# EAGLE board D43324 (EAGLE 6.1)
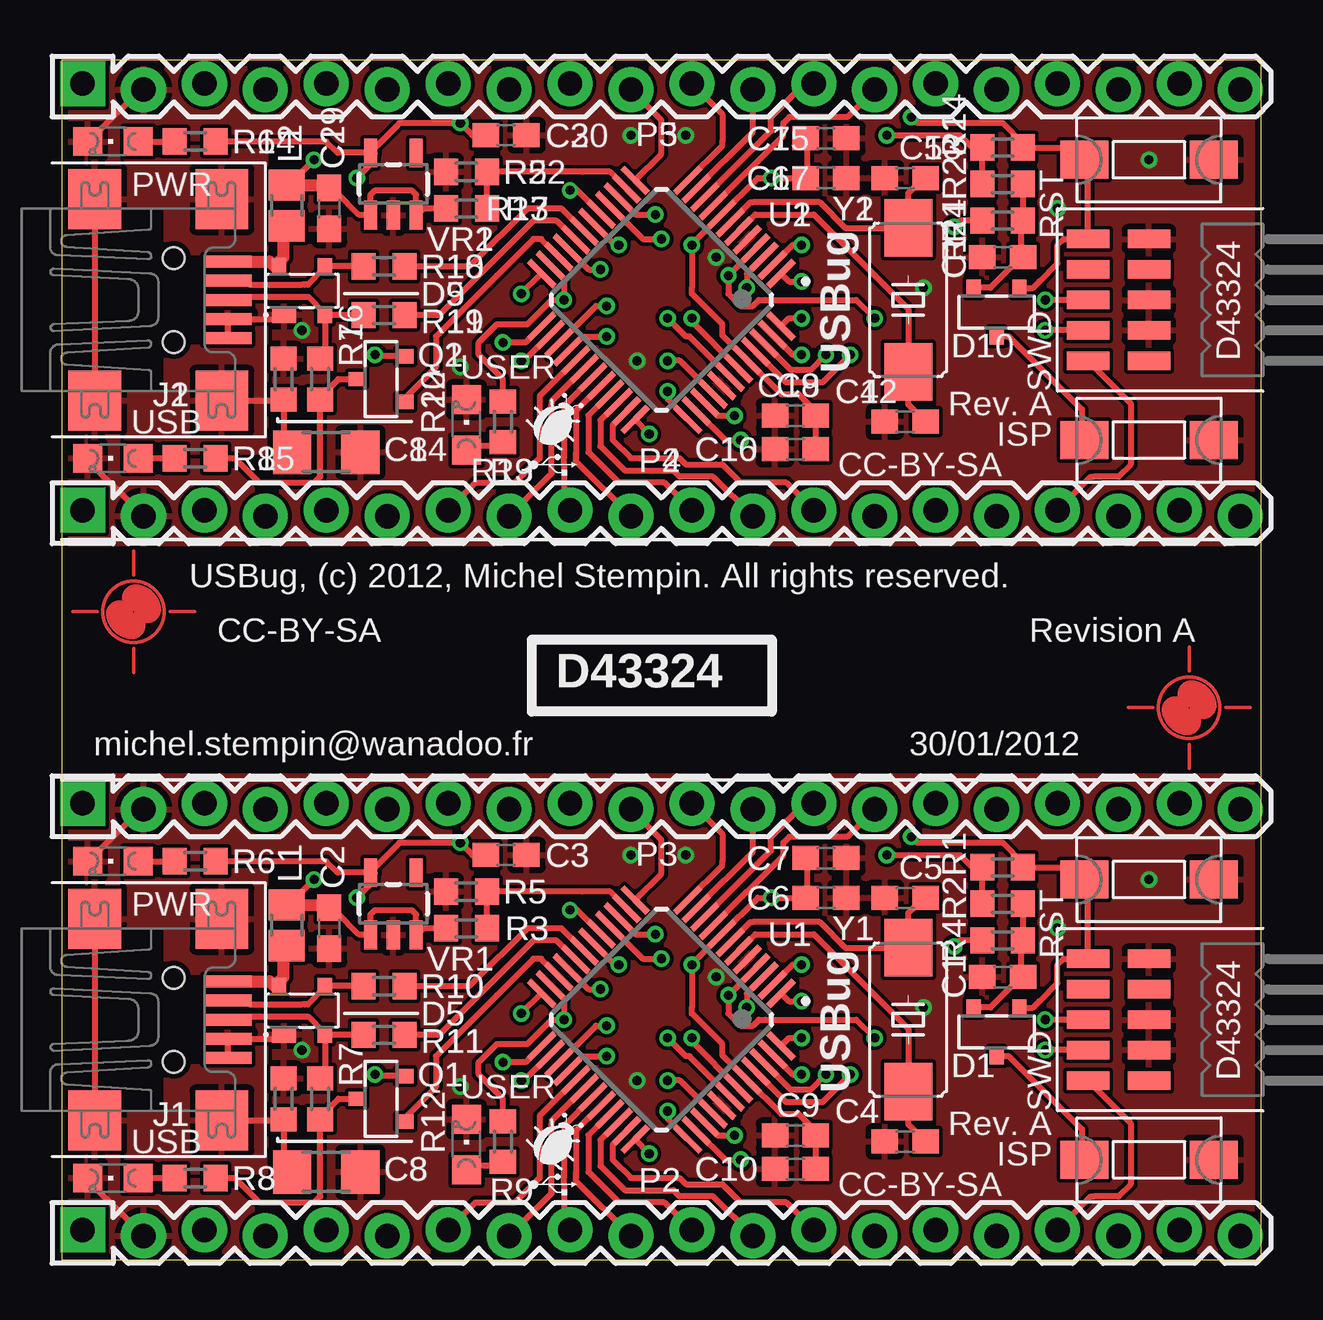
[diagram p0: board, top side]
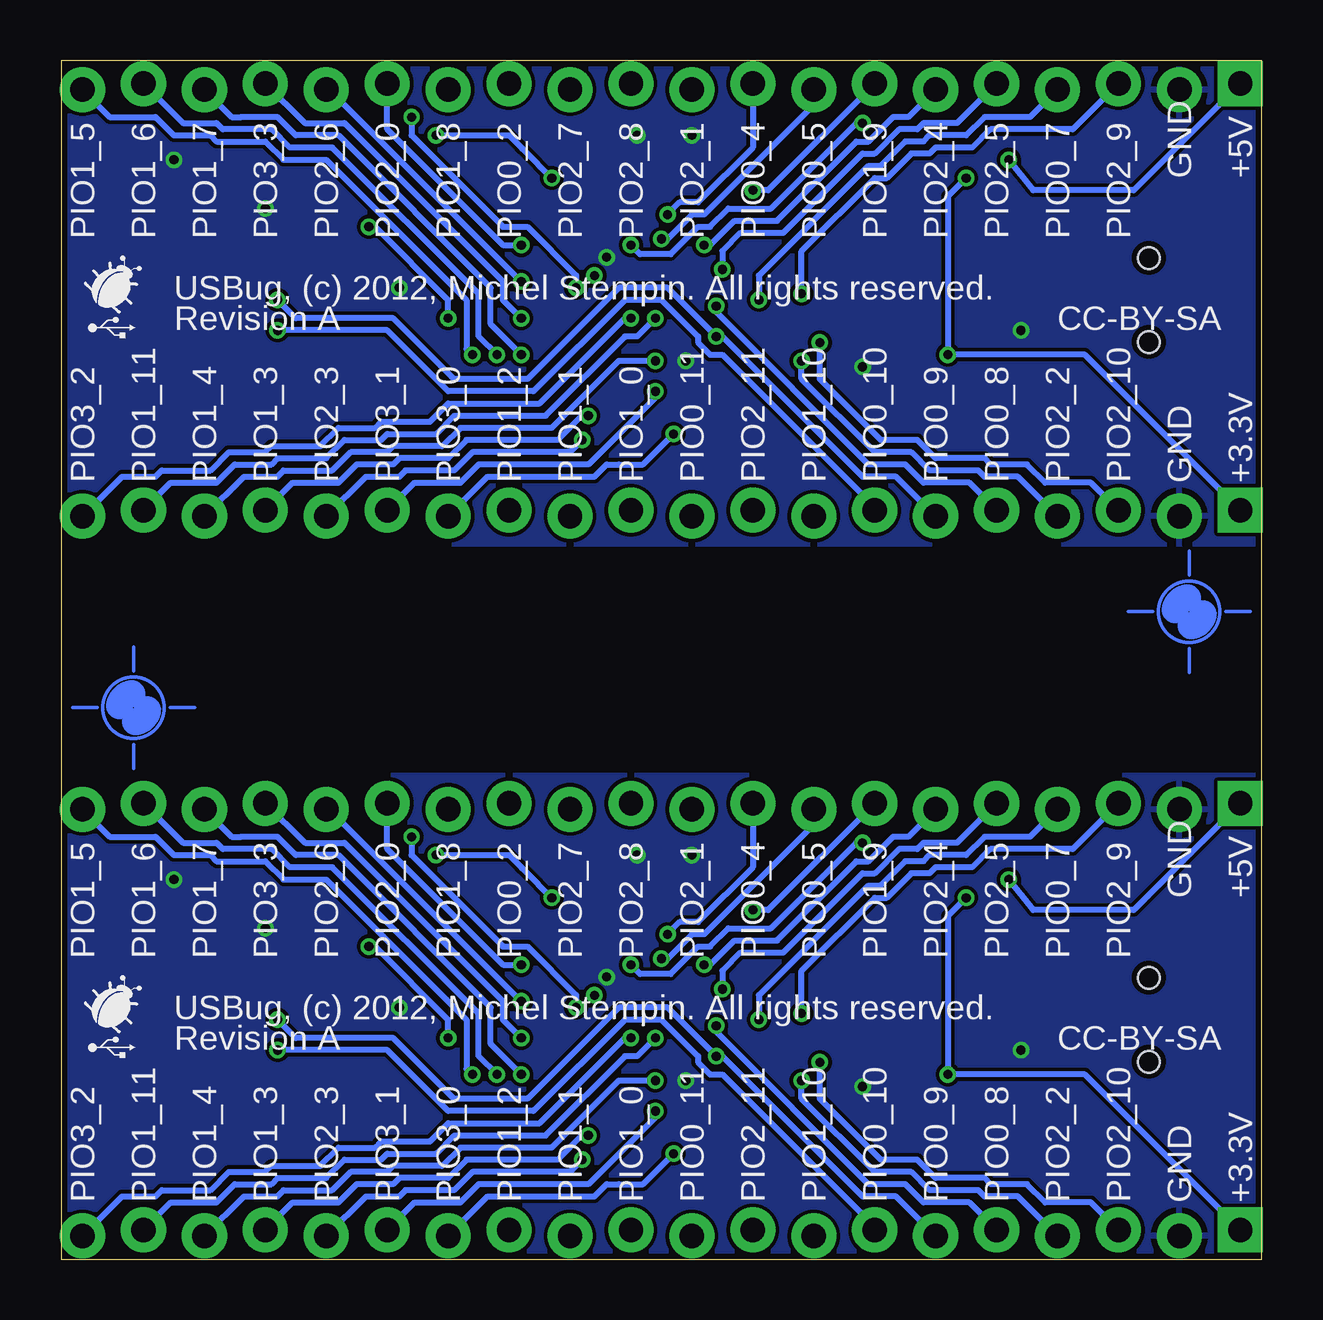
[diagram p1: board, bottom side, seen from below]

Size 50 x 50 mm. Coordinates in mm from the lower left corner, seen from the top.
Outline: 0,0 50,0 50,50 0,50 0,0
Copper layers (1*16): Top 0.035mm / dielectric 1.5mm / Bottom 0.035mm
Design rules: minimum track width 6mil, minimum drill 12mil, track to track 6mil, track to pad 6mil, pad to pad 6mil, via to via 6mil, smd to smd 0mil, copper to edge 10mil, drill to drill 10mil, minimum pad ring 10mil, minimum via ring 6mil, stop-mask expansion 2mil, vias tented up to drill 100mil, thermal gap 10mil

## Footprints (pad centres in the part's own frame; a part is rotated, then mirrored left to right if it is on the bottom)
CAP_0603 = smd 1.1 x 1: 1 -0.85,0; 2 0.85,0
CAP_1206 = smd 1.6 x 1.803: 1 -1.422,0; 2 1.422,0
SOT23-R = smd 0.6 x 0.7: 1 -0.95,-1; 2 0.95,-1; 3 0,1
LED_0805 = smd 1.2 x 1.2: A 0,-1.05; C 0,1.05
SOT143B = smd 1 x 0.7: 1 -0.75,-1 | smd 0.6 x 0.7: 2 0.95,-1; 3 0.95,1; 4 -0.95,1
UX60-MB-5ST = smd 2 x 0.5: 1 2.25,1.6; 2 2.25,0.8; 3 2.25,0; 4 2.25,-0.8; 5 2.25,-1.6 | smd 2.2 x 2.5: M1 -3.3,-4.2; M2 -3.3,4.2; M3 2,4.2; M4 2,-4.2 | hole 0.9: 0,-1.75; 0,1.75
FB_0603 = smd 1.3 x 1.5: 1 -0.85,0; 2 0.85,0
FTSH-105-01-L-DH = smd 0.762 x 1.778: 1 -2.54,-1.27; 2 -2.54,1.27; 3 -1.27,-1.27; 4 -1.27,1.27; 5 0,-1.27; 6 0,1.27; 7 1.27,-1.27; 8 1.27,1.27; 9 2.54,-1.27; 10 2.54,1.27
SPARKFUN_1X20_LOCK = drill 1.016 pad 1.88 square: 1 0,0.127 | drill 1.016 pad 1.88: 2 2.54,-0.127; 3 5.08,0.127; 4 7.62,-0.127; 5 10.16,0.127; 6 12.7,-0.127; 7 15.24,0.127; 8 17.78,-0.127; 9 20.32,0.127; 10 22.86,-0.127; 11 25.4,0.127; 12 27.94,-0.127; 13 30.48,0.127; 14 33.02,-0.127; 15 35.56,0.127; 16 38.1,-0.127; 17 40.64,0.127; 18 43.18,-0.127; 19 45.72,0.127; 20 48.26,-0.127
RES_0603 = smd 1 x 1.1: 1 -0.85,0; 2 0.85,0
ADTSM3 = smd 2 x 1.6: 1 -2.7,0; 2 2.7,0
LQFP48 = smd 1.5 x 0.25: 1 -4.3,2.75; 2 -4.3,2.25; 3 -4.3,1.75; 4 -4.3,1.25; 5 -4.3,0.75; 6 -4.3,0.25; 7 -4.3,-0.25; 8 -4.3,-0.75; 9 -4.3,-1.25; 10 -4.3,-1.75; 11 -4.3,-2.25; 12 -4.3,-2.75; 25 4.3,-2.75; 26 4.3,-2.25; 27 4.3,-1.75; 28 4.3,-1.25; 29 4.3,-0.75; 30 4.3,-0.25; 31 4.3,0.25; 32 4.3,0.75; 33 4.3,1.25; 34 4.3,1.75; 35 4.3,2.25; 36 4.3,2.75 | smd 0.25 x 1.5: 13 -2.75,-4.3; 14 -2.25,-4.3; 15 -1.75,-4.3; 16 -1.25,-4.3; 17 -0.75,-4.3; 18 -0.25,-4.3; 19 0.25,-4.3; 20 0.75,-4.3; 21 1.25,-4.3; 22 1.75,-4.3; 23 2.25,-4.3; 24 2.75,-4.3; 37 2.75,4.3; 38 2.25,4.3; 39 1.75,4.3; 40 1.25,4.3; 41 0.75,4.3; 42 0.25,4.3; 43 -0.25,4.3; 44 -0.75,4.3; 45 -1.25,4.3; 46 -1.75,4.3; 47 -2.25,4.3; 48 -2.75,4.3
SOT23-5 = smd 0.55 x 1.2: 1 -0.95,-1.3; 2 0,-1.3; 3 0.95,-1.3; 4 0.95,1.3; 5 -0.95,1.3
NX5032GA = smd 2.4 x 2: 1 -3,0; 2 3,0

## Placement (x,y rotation side)
C1  100n  [CAP_0603]  39.22,11.78 180 top
C2  1u/16V  [CAP_0603]  11.16,13.81 270 top
C3  2u2/10V  [CAP_0603]  18.52,16.86 0 top
C4  18p/50V  [CAP_0603]  35.16,4.92 180 top
C5  18p/50V  [CAP_0603]  35.16,15.08 180 top
C6  100n  [CAP_0603]  31.86,15.08 0 top
C7  10n  [CAP_0603]  31.86,16.73 0 top
C8  10n/500V  [CAP_1206]  11.03,3.65 0 top
C9  100n  [CAP_0603]  30.59,5.17 180 top
C10  10n  [CAP_0603]  30.59,3.78 180 top
C11  100n  [CAP_0603]  39.22,41.78 180 top
C12  18p/50V  [CAP_0603]  35.16,34.92 180 top
C13  18p/50V  [CAP_0603]  35.16,45.08 180 top
C14  10n/500V  [CAP_1206]  11.03,33.65 0 top
C15  10n  [CAP_0603]  31.86,46.73 0 top
C16  10n  [CAP_0603]  30.59,33.78 180 top
C17  100n  [CAP_0603]  31.86,45.08 0 top
C18  100n  [CAP_0603]  30.59,35.17 180 top
C19  1u/16V  [CAP_0603]  11.16,43.81 270 top
C20  2u2/10V  [CAP_0603]  18.52,46.86 0 top
D1  BAT54C  [SOT23-R]  38.97,9.49 180 top
D2  POWER  [LED_0805]  2.14,16.6 90 top
D3  USB  [LED_0805]  2.14,3.4 90 top
D4  USER  [LED_0805]  16.87,4.79 0 top
D5  PRTR5V0U2X  [SOT143B]  10.01,10.38 0 top
D6  USER  [LED_0805]  16.87,34.79 0 top
D7  POWER  [LED_0805]  2.14,46.6 90 top
D8  USB  [LED_0805]  2.14,33.4 90 top
D9  PRTR5V0U2X  [SOT143B]  10.01,40.38 0 top
D10  BAT54C  [SOT23-R]  38.97,39.49 180 top
E$1  [PASS-ROUND]  3,27 0 top
E$2  [PASS-ROUND]  47,23 0 top
E$3  [USBUG]  -2.94,15.87 0 top
J1  MINI-B USB  [UX60-MB-5ST]  4.68,10 0 top
J2  MINI-B USB  [UX60-MB-5ST]  4.68,40 0 top
L1  BLM18EG601SN1D  [FB_0603]  9.38,13.94 270 top
L2  BLM18EG601SN1D  [FB_0603]  9.38,43.94 270 top
P1  FTSH-105-01-L-DH  [FTSH-105-01-L-DH]  44.05,10 90 top
P2  LEFT  [SPARKFUN_1X20_LOCK]  0.87,1.11 0 top
P3  RIGHT  [SPARKFUN_1X20_LOCK]  0.87,18.89 0 top
P4  LEFT  [SPARKFUN_1X20_LOCK]  0.87,31.11 0 top
P5  RIGHT  [SPARKFUN_1X20_LOCK]  0.87,48.89 0 top
P6  FTSH-105-01-L-DH  [FTSH-105-01-L-DH]  44.05,40 90 top
Q1  BSS84-7-F  [SOT23-R]  13.32,6.7 90 top
Q2  BSS84-7-F  [SOT23-R]  13.32,36.7 90 top
R1  20K  [RES_0603]  39.22,16.35 180 top
R2  20K  [RES_0603]  39.22,14.83 180 top
R3  10k  [RES_0603]  16.87,13.81 180 top
R4  1k  [RES_0603]  39.22,13.3 0 top
R5  100k  [RES_0603]  16.87,15.33 0 top
R6  150R  [RES_0603]  5.57,16.6 0 top
R7  1k5  [RES_0603]  10.78,6.7 270 top
R8  150R  [RES_0603]  5.57,3.4 0 top
R9  1k  [RES_0603]  18.4,4.92 90 top
R10  33R  [RES_0603]  13.44,11.4 0 top
R11  33R  [RES_0603]  13.44,9.37 0 top
R12  1M  [RES_0603]  9.25,6.7 270 top
R13  1k  [RES_0603]  18.4,34.92 90 top
R14  150R  [RES_0603]  5.57,46.6 0 top
R15  150R  [RES_0603]  5.57,33.4 0 top
R16  1k5  [RES_0603]  10.78,36.7 270 top
R17  10k  [RES_0603]  16.87,43.81 180 top
R18  33R  [RES_0603]  13.44,41.4 0 top
R19  33R  [RES_0603]  13.44,39.37 0 top
R20  1M  [RES_0603]  9.25,36.7 270 top
R21  1k  [RES_0603]  39.22,43.3 0 top
R22  100k  [RES_0603]  16.87,45.33 0 top
R23  20K  [RES_0603]  39.22,44.83 180 top
R24  20K  [RES_0603]  39.22,46.35 180 top
S1  RESET  [ADTSM3]  45.32,15.84 0 top
S2  ISP  [ADTSM3]  45.32,4.16 0 top
S3  ISP  [ADTSM3]  45.32,34.16 0 top
S4  RESET  [ADTSM3]  45.32,45.84 0 top
U1  LPC11U12FBD48  [LQFP48]  25,10 225 top
U2  LPC11U12FBD48  [LQFP48]  25,40 225 top
U$13  USBUG  [USBUG]  -2.94,-14.13 0 top  (outside the outline)
VR1  MIC5225-3.3YM5  [SOT23-5]  13.82,14.83 0 top
VR2  MIC5225-3.3YM5  [SOT23-5]  13.82,44.83 0 top
Y1  12MHz  [NX5032GA]  35.29,10 90 top
Y2  12MHz  [NX5032GA]  35.29,40 90 top

## Library data of the parts
C1-C3 C6 C7 C9-C11 C15-C20 D1-D10 E$1-E$3 J1 J2 L1 L2 P1-P6 Q1 Q2 R1-R24 S1-S4 U$13 Y1 Y2 = USBug
C4 C5 C12 C13 = USBug; DIELECTRIC: NP0
C8 C14 = USBug; FOOTPRINT: 1206
U1 U2 = USBug; FLASH_SIZE: 16 kB
VR1 VR2 = USBug; VOLTAGE: 3.3V

## Nets
+3.3V: C3.1 C6.1 C7.1 C9.1 C10.1 P2.1 Q1.2 R1.2 R2.2 R6.2 U1.8 U1.44 VR1.5
+3.3V1: C15.1 C16.1 C17.1 C18.1 C20.1 P4.1 Q2.2 R14.2 R23.2 R24.2 U2.8 U2.44 VR2.5
+5V: C2.1 L1.1 P3.1 R3.2 VR1.1 VR1.3
+5V1: C19.1 L2.1 P5.1 R17.2 VR2.1 VR2.3
EARTH: C8.1 J1.M1 J1.M2 J1.M3 J1.M4 R12.2
EARTH1: C14.1 J2.M1 J2.M2 J2.M3 J2.M4 R20.2
GND: C1.2 C2.2 C3.2 C4.2 C5.2 C6.2 C7.2 C8.2 C9.2 C10.2 D2.C D3.C D4.C D5.1 J1.4 J1.5 P1.3 P1.5 P1.9 P2.2 P3.2 R5.1 R12.1 S1.2 S2.2 U1.5 U1.41 VR1.2
GND1: C11.2 C12.2 C13.2 C14.2 C15.2 C16.2 C17.2 C18.2 C19.2 C20.2 D6.C D7.C D8.C D9.1 J2.4 J2.5 P4.2 P5.2 P6.3 P6.5 P6.9 R20.1 R22.1 S3.2 S4.2 U2.5 U2.41 VR2.2
ISP: R4.1 U1.4
ISP1: R21.1 U2.4
N$1: D1.3 S2.1
N$2: C1.1 D1.2 R2.1 R4.2
N$3: D2.A R6.1
N$4: D4.A R9.1
N$5: Q2.3 R15.2 R16.2
N$6: C11.1 D10.2 R21.2 R23.1
N$7: D7.A R14.1
N$8: D6.A R13.1
N$9: D3.A R8.1
N$10: D8.A R15.1
N$11: D10.3 S3.1
N$13: Q1.3 R7.2 R8.2
PIO0_1: P4.5 U2.27
PIO0_2: P3.13 U1.10
PIO0_3: P4.6 P6.6 U2.28
PIO0_4: P3.9 U1.15
PIO0_5: P3.8 U1.16
PIO0_6: P4.7 P6.4 U2.29
PIO0_7: P3.4 R9.2 U1.23
PIO0_8: P2.5 U1.27
PIO0_9: P1.6 P2.6 U1.28
PIO0_10: P1.4 P2.7 U1.29
PIO0_11: P2.10 U1.32
PIO0_12: P4.10 U2.32
PIO0_13: P5.4 R13.2 U2.23
PIO0_14: P5.8 U2.16
PIO0_15: P5.9 U2.15
PIO0_16: P5.13 U2.10
PIO1_0: P2.11 U1.33
PIO1_1: P2.12 U1.34
PIO1_2: P2.13 U1.35
PIO1_3: P1.2 P2.17 U1.39
PIO1_4: P2.18 U1.40
PIO1_5: P3.20 U1.45
PIO1_6: P3.19 U1.46
PIO1_7: P3.18 U1.47
PIO1_8: P3.14 U1.9
PIO1_9: P3.7 U1.17
PIO1_10: P2.8 U1.30
PIO1_11: P2.19 U1.42
PIO1_12: P5.14 U2.9
PIO1_13: P5.7 U2.17
PIO1_14: P4.8 U2.30
PIO1_15: P4.19 U2.42
PIO1_16: P5.20 U2.45
PIO1_17: P4.11 U2.33
PIO1_18: P4.12 U2.34
PIO1_19: P4.13 U2.35
PIO1_20: P4.17 P6.2 U2.39
PIO1_21: P4.18 U2.40
PIO1_22: P5.18 U2.47
PIO1_23: P5.19 U2.46
PIO2_0: P3.15 U1.2
PIO2_1: P3.10 U1.13
PIO2_2: P2.4 U1.26
PIO2_3: P2.16 U1.38
PIO2_4: P3.6 U1.18
PIO2_5: P3.5 U1.21
PIO2_6: P3.16 U1.1
PIO2_7: P3.12 U1.11
PIO2_8: P3.11 U1.12
PIO2_9: P3.3 U1.24
PIO2_10: P2.3 U1.25
PIO2_11: P2.9 U1.31
PIO2_12: P5.10 U2.13
PIO2_13: P4.4 U2.26
PIO2_14: P4.16 U2.38
PIO2_15: P5.6 U2.18
PIO2_16: P5.5 U2.21
PIO2_17: P5.16 U2.1
PIO2_18: P5.12 U2.11
PIO2_19: P5.11 U2.12
PIO2_20: P5.3 U2.24
PIO2_21: P4.3 U2.25
PIO2_22: P4.9 U2.31
PIO2_23: P5.15 U2.2
PIO3_0: P2.14 U1.36
PIO3_1: P2.15 U1.37
PIO3_2: P2.20 U1.43
PIO3_3: P3.17 U1.48
PIO3_4: P4.14 U2.36
PIO3_5: P4.15 U2.37
PIO3_6: P4.20 U2.43
PIO3_7: P5.17 U2.48
RESET: D1.1 P1.10 R1.1 S1.1 U1.3
RESET1: D10.1 P6.10 R24.1 S4.1 U2.3
USB_CONNECT: Q1.1 U1.22
USB_CONNECT1: Q2.1 U2.22
USB_DM: D5.3 J1.2 R10.1
USB_DM1: D9.3 J2.2 R18.1
USB_DP: D5.2 J1.3 R7.1 R11.1
USB_DP1: D9.2 J2.3 R16.1 R19.1
USB_VBUS: R3.1 R5.2 U1.14
USB_VBUS1: R17.1 R22.2 U2.14
USBD+: R10.2 U1.19
USBD+1: R18.2 U2.19
USBD-: R11.2 U1.20
USBD-1: R19.2 U2.20
VBUS: D5.4 J1.1 L1.2
VBUS1: D9.4 J2.1 L2.2
XTALIN: C4.1 U1.6 Y1.1
XTALIN1: C12.1 U2.6 Y2.1
XTALOUT: C5.1 U1.7 Y1.2
XTALOUT1: C13.1 U2.7 Y2.2

## Tracks (layer width: path | path; a pad name or v marks a point on that pad's centre or on a via)
+3.3V  (via drill 0.38)
  Top 0.254: VR1.5 11.51,16.13 11.03,16.6 6.46,16.6 | 31.1,16.6 31.1,15.08 C6.1 v29.57,15.08 29.02,15.08 U1.8 26.27,12.33 v26.27,12.29 26.27,10.51 26.27,10.25 27.54,8.98 27.54,8.52 U1.44 30,6.06 30.71,6.06 31.35,5.43 31.35,5.17 C9.1 C10.1 | 12.81,16.1 14.08,17.37 v16.62,17.37 17.13,16.86 C3.1 | Q1.2 13.13,7.65 v13.06,7.71 | v34.4,16.86 37.45,16.86 37.95,16.35 R1.2 R2.2 | 12.81,16.1 13.06,16.1 | 12.81,16.1 12.81,15.59 v12.3,15.08
  Top 0.406: 6.46,16.6 R6.2 | VR1.5 12.87,16.1 12.81,16.1 | C7.1 31.1,16.73 31.1,16.6 | 31.1,15.08 C6.1
  Bottom 0.254: v26.27,12.29 25.89,11.9 24.62,11.9 24.49,12.03 24.24,12.29 23.48,13.05 22.97,13.05 22.21,13.81 20.43,13.81 16.87,17.37 v16.62,17.37 | 30.84,16.35 30.71,16.22 | 30.71,16.22 v29.57,15.08 | v34.4,16.86 31.35,16.86 30.71,16.22 | v12.3,15.08 13.06,14.32 v13.06,7.71 7.35,7.71 P2.1
+3.3V1  (via drill 0.38)
  Top 0.254: VR2.5 11.51,46.13 11.03,46.6 6.46,46.6 | 31.1,46.6 31.1,45.08 C17.1 v29.57,45.08 29.02,45.08 U2.8 26.27,42.33 v26.27,42.29 26.27,40.51 26.27,40.25 27.54,38.98 27.54,38.52 U2.44 30,36.06 30.71,36.06 31.35,35.43 31.35,35.17 C18.1 C16.1 | 12.81,46.1 14.08,47.37 v16.62,47.37 17.13,46.86 C20.1 | Q2.2 13.13,37.65 v13.06,37.71 | v34.4,46.86 37.45,46.86 37.95,46.35 R24.2 R23.2 | 12.81,46.1 13.06,46.1 | 12.81,46.1 12.81,45.59 v12.3,45.08
  Top 0.406: 6.46,46.6 R14.2 | VR2.5 12.87,46.1 12.81,46.1 | C15.1 31.1,46.73 31.1,46.6 | 31.1,45.08 C17.1
  Bottom 0.254: v26.27,42.29 25.89,41.91 24.62,41.91 24.49,42.03 24.24,42.29 23.48,43.05 22.97,43.05 22.21,43.81 20.43,43.81 16.87,47.37 v16.62,47.37 | 30.84,46.35 30.71,46.22 | 30.71,46.22 v29.57,45.08 | v34.4,46.86 31.35,46.86 30.71,46.22 | v12.3,45.08 13.06,44.32 v13.06,37.71 7.35,37.71 P4.1
+5V  (via drill 0.38)
  Top 0.254: 11.03,14.79 C2.1 | R3.2 15.09,13.81 14.84,13.56 14.81,13.53 VR1.3 14.77,14.38 14.59,14.57 13.07,14.57 12.87,14.38 VR1.1 12.84,13.56 12.81,13.56 12.39,13.56 11.44,14.51 11.28,14.66 | v10.52,15.84 9.38,14.7 L1.1
  Top 0.406: C2.1 11.28,14.66 11.28,14.57
  Top 0.508: L1.1 11.03,14.79
  Bottom 0.254: v10.52,15.84 9.51,14.57 5.31,14.57 P3.1
+5V1  (via drill 0.38)
  Top 0.254: 11.03,44.79 C19.1 | R17.2 15.09,43.81 14.84,43.56 14.81,43.53 VR2.3 14.77,44.38 14.59,44.57 13.07,44.57 12.87,44.38 VR2.1 12.84,43.56 12.81,43.56 12.39,43.56 11.44,44.51 11.28,44.66 | v10.52,45.84 9.38,44.7 L2.1
  Top 0.406: C19.1 11.28,44.66 11.28,44.57
  Top 0.508: L2.1 11.03,44.79
  Bottom 0.254: v10.52,45.84 9.51,44.57 5.31,44.57 P5.1
EARTH
  Top 0.254: J1.M4 9.08,5.8 R12.2 9.25,4.01 C8.1 | J1.M2 1.38,5.43 0.87,4.92
  pour Top: -0.4,16.35 8.49,16.35 8.49,3.65 -0.4,3.65
EARTH1
  Top 0.254: J2.M4 9.08,35.8 R20.2 9.25,34.01 C14.1 | J2.M2 1.38,35.43 0.87,34.92
  pour Top: -0.4,46.35 8.49,46.35 8.49,33.65 -0.4,33.65
GND  (via drill 0.38)
  Top 0.254: D5.1 9.08,9.2 J1.4 J1.5 | D3.C 1.09,3.3 P2.2 | D2.C 1.25,16.6 1.25,16.73 3.41,18.89
  other vias: 10.01,8.73 27.29,11.78 16.62,7.21 23.73,16.86 26.02,16.86 45.32,15.84 23.98,7.46 35.92,10.51 41.51,13.81
  pour Top (rank 2): -0.4,20.16 50.4,20.16 50.4,-0.16 -0.4,-0.16
  pour Bottom: -0.4,20.16 50.4,20.16 50.4,-0.16 -0.4,-0.16
GND1  (via drill 0.38)
  Top 0.254: D9.1 9.08,39.2 J2.4 J2.5 | D8.C 1.09,33.3 P4.2 | D7.C 1.25,46.6 1.25,46.73 3.41,48.89
  other vias: 10.01,38.73 27.29,41.78 16.62,37.21 23.73,46.86 26.02,46.86 45.32,45.84 23.98,37.46 35.92,40.51 41.51,43.81
  pour Top (rank 2): -0.4,50.16 50.4,50.16 50.4,29.84 -0.4,29.84
  pour Bottom: -0.4,50.16 50.4,50.16 50.4,29.84 -0.4,29.84
ISP  (via drill 0.38)
  Top 0.254: U1.4 28.92,12.15 v27.79,11.02 27.79,10.25 28.3,9.75 28.81,9.75 29.06,10 29.32,10 33.13,10 v33.89,9.24 | 38.46,13.3 R4.1 37.45,13.3 v37.19,13.05
  Bottom 0.254: v33.89,9.24 33.89,10 36.94,13.05 v37.19,13.05
ISP1  (via drill 0.38)
  Top 0.254: U2.4 28.92,42.15 v27.79,41.02 27.79,40.25 28.3,39.75 28.81,39.75 29.06,40 29.32,40 33.13,40 v33.89,39.24 | 38.46,43.3 R21.1 37.45,43.3 v37.19,43.05
  Bottom 0.254: v33.89,39.24 33.89,40 36.94,43.05 v37.19,43.05
N$1
  Top 0.254: S2.1 42.53,4.16 42.53,5.43 39.48,8.48 38.97,8.48 D1.3
N$2
  Top 0.254: R2.1 40.07,13.39 | 40.07,13.39 39.99,13.3 39.99,11.87 | 40.07,13.39 R4.2 | 39.99,11.87 C1.1 | 39.99,11.87 39.99,11.78 38.72,10.51 37.95,10.51 38,10.51 D1.2
N$3
  Top 0.254: D2.A 4.68,16.6 4.68,16.35
  Top 0.406: R6.1 4.68,16.6 4.68,16.35
N$4
  Top 0.254: R9.1 18.23,3.9 16.87,3.9 D4.A
N$5
  Top 0.254: R15.2 7.22,33.4 8.24,32.38 10.52,32.38 10.78,32.63 R16.2 10.78,35.94 11.54,36.7 12.3,36.7 Q2.3
N$6
  Top 0.254: R23.1 40.07,43.39 | 40.07,43.39 39.99,43.3 39.99,41.87 | 40.07,43.39 R21.2 | 39.99,41.87 C11.1 | 39.99,41.87 39.99,41.78 38.72,40.51 37.95,40.51 38,40.51 D10.2
N$7
  Top 0.254: D7.A 4.68,46.6 4.68,46.35
  Top 0.406: R14.1 4.68,46.6 4.68,46.35
N$8
  Top 0.254: R13.1 18.23,33.9 16.87,33.9 D6.A
N$9
  Top 0.254: D3.A R8.1
N$10
  Top 0.254: D8.A R15.1
N$11
  Top 0.254: S3.1 42.53,34.16 42.53,35.43 39.48,38.48 38.97,38.48 D10.3
N$13
  Top 0.254: R8.2 7.22,3.4 8.24,2.38 10.52,2.38 10.78,2.63 R7.2 10.78,5.94 11.54,6.7 12.3,6.7 Q1.3
PIO0_1  (via drill 0.38)
  Top 0.254: U2.27 22.27,39.75 v22.71,39.75
  Bottom 0.254: v22.71,39.75 22.71,39.49 16.36,33.14 14.84,33.14 14.08,32.38 12.17,32.38 P4.5
PIO0_2
  Top 0.254: U1.10 29.57,17.05 29.57,17.62 30.97,19.02 P3.13
PIO0_3  (via drill 0.38)
  Top 0.254: U2.28 21.71,38.48 v22.71,38.48 | P6.6 v41,40
  Bottom 0.254: P4.6 15.22,32.63 16.62,32.63 22.46,38.48 v22.71,38.48 24.75,40.51 26.78,40.51 30.59,36.7 33.64,36.7 36.18,39.24 40.24,39.24 v41,40
PIO0_4  (via drill 0.38)
  Top 0.254: U1.15 23.92,13.56 v24.75,13.56
  Bottom 0.254: P3.9 21.19,16.35 23.48,14.06 24.24,14.06 v24.75,13.56
PIO0_5  (via drill 0.38)
  Top 0.254: U1.16 24.23,12.54 v25,12.54
  Bottom 0.254: v25,12.54 24.75,12.54 23.73,13.56 23.22,13.56 18.65,18.13 P3.8
PIO0_6  (via drill 0.38)
  Top 0.254: U2.29 19.92,35.98 19.92,33.4 18.9,32.38 17.25,32.38 P4.7 | P6.4 v41,38.73
  Bottom 0.254: v41,38.73 36.43,38.73 33.89,36.19 30.33,36.19 26.52,40 25,40 23.48,38.48 23.48,38.22 22.97,37.71 22.46,37.71 16.11,31.36 P4.7
PIO0_7  (via drill 0.38)
  Top 0.254: R9.2 18.4,6.7 17.38,7.71 17.38,8.22 18.14,8.98 19.41,8.98 20.43,10 v20.94,10 20.94,10.88 U1.23
  Bottom 0.254: P3.4 9.63,17.62 11.54,17.62 12.3,16.86 13.82,16.86 14.08,16.6 14.84,16.6 15.86,15.59 16.36,15.59 20.94,11.02 v20.94,10
PIO0_8  (via drill 0.38)
  Top 0.254: U1.27 22.27,9.75 v22.71,9.75
  Bottom 0.254: v22.71,9.75 22.71,9.49 16.36,3.14 14.84,3.14 14.08,2.38 12.17,2.38 P2.5
PIO0_9  (via drill 0.38)
  Top 0.254: U1.28 21.71,8.48 v22.71,8.48 | P1.6 v41,10
  Bottom 0.254: P2.6 15.22,2.63 16.62,2.63 22.46,8.48 v22.71,8.48 24.75,10.51 26.78,10.51 30.59,6.7 33.64,6.7 36.18,9.24 40.24,9.24 v41,10
PIO0_10  (via drill 0.38)
  Top 0.254: U1.29 19.92,5.98 19.92,3.4 18.9,2.38 17.25,2.38 P2.7 | P1.4 v41,8.73
  Bottom 0.254: v41,8.73 36.43,8.73 33.89,6.19 30.33,6.19 26.52,10 25,10 23.48,8.48 23.48,8.22 22.97,7.71 22.46,7.71 16.11,1.36 P2.7
PIO0_11
  Top 0.254: P2.10 21.44,3.27 21.44,3.65 | U1.32 21.44,5.38 21.44,3.65 | 21.44,3.65 21.44,3.4
PIO0_12
  Top 0.254: P4.10 21.44,33.27 21.44,33.65 | U2.32 21.44,35.38 21.44,33.65 | 21.44,33.65 21.44,33.4
PIO0_13  (via drill 0.38)
  Top 0.254: R13.2 18.4,36.7 17.38,37.71 17.38,38.22 18.14,38.98 19.41,38.98 20.43,40 v20.94,40 20.94,40.88 U2.23
  Bottom 0.254: P5.4 9.63,47.62 11.54,47.62 12.3,46.86 13.82,46.86 14.08,46.6 14.84,46.6 15.86,45.59 16.36,45.59 20.94,41.02 v20.94,40
PIO0_14  (via drill 0.38)
  Top 0.254: U2.16 24.23,42.54 v25,42.54
  Bottom 0.254: v25,42.54 24.75,42.54 23.73,43.56 23.22,43.56 18.65,48.13 P5.8
PIO0_15  (via drill 0.38)
  Top 0.254: U2.15 23.92,43.56 v24.75,43.56
  Bottom 0.254: P5.9 21.19,46.35 23.48,44.06 24.24,44.06 v24.75,43.56
PIO0_16
  Top 0.254: U2.10 29.57,47.05 29.57,47.62 30.97,49.02 P5.13
PIO1_0
  Top 0.254: U1.33 21.95,5.18 21.95,3.65 23.22,2.38 25.13,2.38 P2.11
PIO1_1
  Top 0.254: U1.34 22.46,4.98 22.46,3.9 23.48,2.89 25.51,2.89 25.76,2.63 27.16,2.63 P2.12
PIO1_2
  Top 0.254: U1.35 22.97,4.79 22.97,4.16 23.73,3.4 25.76,3.4 26.02,3.14 27.29,3.14 27.54,3.14 28.3,2.38 30.21,2.38 P2.13
PIO1_3  (via drill 0.38)
  Top 0.254: U1.39 27.35,5.17 v28.05,5.17 | P2.17 42.91,2.63 43.03,2.63 44.05,2.63 44.56,3.14 44.56,5.68 P1.2
  Bottom 0.254: 28.3,5.17 v28.05,5.17 28.3,5.17 | 28.3,5.17 29.32,4.16 33.13,4.16 33.89,3.4 35.92,3.4 36.18,3.14 37.7,3.14 38.46,2.38 40.37,2.38 P2.17
PIO1_4  (via drill 0.38)
  Top 0.254: U1.40 25.77,7.46 v25.25,7.46
  Bottom 0.254: P2.18 42.4,2.63 41,2.63 40.75,2.89 38.72,2.89 37.95,3.65 36.43,3.65 36.18,3.9 34.14,3.9 33.38,4.67 29.57,4.67 26.78,7.46 v25.25,7.46
PIO1_5  (via drill 0.38)
  Top 0.254: U1.45 30.2,6.57 31.73,6.57 v32.87,7.71
  Bottom 0.254: P3.20 47.99,17.62 46.08,17.62 45.32,16.86 43.8,16.86 43.54,16.6 41.51,16.6 40.75,15.84 38.97,15.84 33.13,10 33.13,7.97 v32.87,7.71
PIO1_6  (via drill 0.38)
  Top 0.254: v31.86,7.71 31.22,7.08 30.71,7.08 30.59,7.08 30.46,7.08 30.4,7.08 U1.46
  Bottom 0.254: P3.19 44.94,17.37 43.54,17.37 43.29,17.11 41.26,17.11 40.49,16.35 38.72,16.35 32.62,10.25 32.62,8.48 v31.86,7.71
PIO1_7  (via drill 0.38)
  Top 0.254: U1.47 30.47,7.71 v30.84,7.71
  Bottom 0.254: v30.84,7.71 32.11,8.98 32.11,10.51 38.46,16.86 40.24,16.86 41,17.62 42.53,17.62 42.91,17.62 P3.18
PIO1_8
  Top 0.254: U1.9 30.08,16.85 30.08,17.11 30.08,17.37 30.33,17.62 32.75,17.62 P3.14
PIO1_9  (via drill 0.38)
  Top 0.254: U1.17 21.49,14.57 v21.19,14.57
  Bottom 0.254: P3.7 20.55,14.57 v21.19,14.57
PIO1_10
  Top 0.254: P2.8 20.43,2.76 20.43,5.68 20.43,5.78 U1.30
PIO1_11  (via drill 0.38)
  Top 0.254: U1.42 26.17,8.48 26.02,8.48 25.51,8.98 v25.25,9.24
  Bottom 0.254: P2.19 45.45,2.38 43.54,2.38 42.78,3.14 41.26,3.14 41,3.4 38.97,3.4 38.21,4.16 36.68,4.16 36.43,4.41 34.4,4.41 33.64,5.17 29.83,5.17 26.52,8.48 26.02,8.48 v25.25,9.24
PIO1_12
  Top 0.254: U2.9 30.08,46.85 30.08,47.11 30.08,47.37 30.33,47.62 32.75,47.62 P5.14
PIO1_13  (via drill 0.38)
  Top 0.254: U2.17 21.49,44.57 v21.19,44.57
  Bottom 0.254: P5.7 20.55,44.57 v21.19,44.57
PIO1_14
  Top 0.254: P4.8 20.43,32.76 20.43,35.68 20.43,35.78 U2.30
PIO1_15  (via drill 0.38)
  Top 0.254: U2.42 26.17,38.48 26.02,38.48 25.51,38.98 v25.25,39.24
  Bottom 0.254: P4.19 45.45,32.38 43.54,32.38 42.78,33.14 41.26,33.14 41,33.4 38.97,33.4 38.21,34.16 36.68,34.16 36.43,34.41 34.4,34.41 33.64,35.17 29.83,35.17 26.52,38.48 26.02,38.48 v25.25,39.24
PIO1_16  (via drill 0.38)
  Top 0.254: U2.45 30.2,36.57 31.73,36.57 v32.87,37.71
  Bottom 0.254: P5.20 47.99,47.62 46.08,47.62 45.32,46.86 43.8,46.86 43.54,46.6 41.51,46.6 40.75,45.84 38.97,45.84 33.13,40 33.13,37.97 v32.87,37.71
PIO1_17
  Top 0.254: U2.33 21.95,35.18 21.95,33.65 23.22,32.38 25.13,32.38 P4.11
PIO1_18
  Top 0.254: U2.34 22.46,34.99 22.46,33.9 23.48,32.89 25.51,32.89 25.76,32.63 27.16,32.63 P4.12
PIO1_19
  Top 0.254: U2.35 22.97,34.79 22.97,34.16 23.73,33.4 25.76,33.4 26.02,33.14 27.29,33.14 27.54,33.14 28.3,32.38 30.21,32.38 P4.13
PIO1_20  (via drill 0.38)
  Top 0.254: U2.39 27.35,35.17 v28.05,35.17 | P4.17 42.91,32.63 43.03,32.63 44.05,32.63 44.56,33.14 44.56,35.68 P6.2
  Bottom 0.254: 28.3,35.17 v28.05,35.17 28.3,35.17 | 28.3,35.17 29.32,34.16 33.13,34.16 33.89,33.4 35.92,33.4 36.18,33.14 37.7,33.14 38.46,32.38 40.37,32.38 P4.17
PIO1_21  (via drill 0.38)
  Top 0.254: U2.40 25.77,37.46 v25.25,37.46
  Bottom 0.254: P4.18 42.4,32.63 41,32.63 40.75,32.89 38.72,32.89 37.95,33.65 36.43,33.65 36.18,33.9 34.14,33.9 33.38,34.67 29.57,34.67 26.78,37.46 v25.25,37.46
PIO1_22  (via drill 0.38)
  Top 0.254: U2.47 30.47,37.71 v30.84,37.71
  Bottom 0.254: v30.84,37.71 32.11,38.98 32.11,40.51 38.46,46.86 40.24,46.86 41,47.62 42.53,47.62 42.91,47.62 P5.18
PIO1_23  (via drill 0.38)
  Top 0.254: v31.86,37.71 31.22,37.08 30.71,37.08 30.59,37.08 30.46,37.08 30.4,37.08 U2.46
  Bottom 0.254: P5.19 44.94,47.37 43.54,47.37 43.29,47.11 41.26,47.11 40.49,46.35 38.72,46.35 32.62,40.25 32.62,38.48 v31.86,37.71
PIO2_0  (via drill 0.38)
  Top 0.254: U1.2 30.47,12.29 v30.84,12.29
  Bottom 0.254: P3.15 36.43,17.11 32.11,12.79 31.6,12.29 v30.84,12.29
PIO2_1
  Top 0.254: P3.10 25,17.49 25,16.08 U1.13
PIO2_2  (via drill 0.38)
  Top 0.254: U1.26 19.28,7.46 v19.16,7.46
  Bottom 0.254: v19.16,7.46 19.16,6.7 16.11,3.65 14.59,3.65 13.82,2.89 11.79,2.89 11.54,2.63 10.14,2.63 P2.4
PIO2_3  (via drill 0.38)
  Top 0.254: U1.38 27.66,4.16 v28.3,4.16
  Bottom 0.254: v28.3,4.16 28.81,3.65 32.87,3.65 33.64,2.89 35.67,2.89 35.92,2.63 37.32,2.63 P2.16
PIO2_4  (via drill 0.38)
  Top 0.254: U1.18 23.07,12.29 v23.22,12.29
  Bottom 0.254: P3.6 14.71,17.62 15.35,17.62 16.36,16.6 16.87,16.6 20.17,13.3 21.95,13.3 22.97,12.29 v23.22,12.29
PIO2_5  (via drill 0.38)
  Top 0.254: U1.21 21.96,11.27 v22.46,11.27
  Bottom 0.254: P3.5 12.68,17.37 14.08,17.37 14.33,17.11 15.09,17.11 16.11,16.1 16.62,16.1 19.92,12.79 21.7,12.79 22.46,12.03 v22.46,11.27
PIO2_6  (via drill 0.38)
  Top 0.254: U1.1 30.32,10.76 v30.84,10.76
  Bottom 0.254: P3.16 38.84,18.76 v30.84,10.76
PIO2_7
  Top 0.254: U1.11 28.81,16.99 P3.12
PIO2_8
  Top 0.254: P3.11 27.54,17.75 27.54,16.6 27.54,16.43 U1.12
PIO2_9  (via drill 0.38)
  Top 0.254: v19.16,10.25 U1.24
  Bottom 0.254: P3.3 7.86,17.11 11.28,17.11 12.05,16.35 13.57,16.35 13.82,16.1 14.59,16.1 15.6,15.08 16.11,15.08 19.16,12.03 v19.16,10.25
PIO2_10  (via drill 0.38)
  Top 0.254: U1.25 19.33,8.22 v18.4,8.22
  Bottom 0.254: v18.4,8.22 18.4,6.7 15.86,4.16 14.33,4.16 13.57,3.4 11.54,3.4 11.28,3.14 9.76,3.14 9,2.38 7.09,2.38 P2.3
PIO2_11
  Top 0.254: U1.31 20.94,5.58 20.94,3.65 | 20.94,3.65 20.94,3.4 | 20.94,3.65 20.94,3.14 20.94,1.87 20.94,1.49 P2.9
PIO2_12
  Top 0.254: P5.10 25,47.49 25,46.08 U2.13
PIO2_13  (via drill 0.38)
  Top 0.254: U2.26 19.28,37.46 v19.16,37.46
  Bottom 0.254: v19.16,37.46 19.16,36.7 16.11,33.65 14.59,33.65 13.82,32.89 11.79,32.89 11.54,32.63 10.14,32.63 P4.4
PIO2_14  (via drill 0.38)
  Top 0.254: U2.38 27.66,34.16 v28.3,34.16
  Bottom 0.254: v28.3,34.16 28.81,33.65 32.87,33.65 33.64,32.89 35.67,32.89 35.92,32.63 37.32,32.63 P4.16
PIO2_15  (via drill 0.38)
  Top 0.254: U2.18 23.07,42.29 v23.22,42.29
  Bottom 0.254: P5.6 14.71,47.62 15.35,47.62 16.36,46.6 16.87,46.6 20.17,43.3 21.95,43.3 22.97,42.29 v23.22,42.29
PIO2_16  (via drill 0.38)
  Top 0.254: U2.21 21.96,41.27 v22.46,41.27
  Bottom 0.254: P5.5 12.68,47.37 14.08,47.37 14.33,47.11 15.09,47.11 16.11,46.1 16.62,46.1 19.92,42.79 21.7,42.79 22.46,42.03 v22.46,41.27
PIO2_17  (via drill 0.38)
  Top 0.254: U2.1 30.32,40.76 v30.84,40.76
  Bottom 0.254: P5.16 38.84,48.76 v30.84,40.76
PIO2_18
  Top 0.254: U2.11 28.81,46.99 P5.12
PIO2_19
  Top 0.254: P5.11 27.54,47.75 27.54,46.6 27.54,46.43 U2.12
PIO2_20  (via drill 0.38)
  Top 0.254: v19.16,40.25 U2.24
  Bottom 0.254: P5.3 7.86,47.11 11.28,47.11 12.05,46.35 13.57,46.35 13.82,46.1 14.59,46.1 15.6,45.08 16.11,45.08 19.16,42.03 v19.16,40.25
PIO2_21  (via drill 0.38)
  Top 0.254: U2.25 19.33,38.22 v18.4,38.22
  Bottom 0.254: v18.4,38.22 18.4,36.7 15.86,34.16 14.33,34.16 13.57,33.4 11.54,33.4 11.28,33.14 9.76,33.14 9,32.38 7.09,32.38 P4.3
PIO2_22
  Top 0.254: U2.31 20.94,35.58 20.94,33.65 | 20.94,33.65 20.94,33.4 | 20.94,33.65 20.94,33.14 20.94,31.87 20.94,31.49 P4.9
PIO2_23  (via drill 0.38)
  Top 0.254: U2.2 30.47,42.29 v30.84,42.29
  Bottom 0.254: P5.15 36.43,47.11 32.11,42.79 31.6,42.29 v30.84,42.29
PIO3_0  (via drill 0.38)
  Top 0.254: v24.49,4.41 U1.36
  Bottom 0.254: P2.14 32.24,2.63 27.79,2.63 27.29,3.14 26.78,3.14 25.76,3.14 v24.49,4.41
PIO3_1  (via drill 0.38)
  Top 0.254: U1.37 25.25,5.86 v25.25,6.19
  Bottom 0.254: P2.15 35.29,2.38 33.38,2.38 32.62,3.14 28.05,3.14 25.25,5.94 v25.25,6.19
PIO3_2  (via drill 0.38)
  Top 0.254: U1.43 26.27,9.08 v26.27,9.24
  Bottom 0.254: P2.20 47.48,2.63 46.08,2.63 45.83,2.89 43.8,2.89 43.03,3.65 41.51,3.65 41.26,3.9 39.22,3.9 38.46,4.67 36.94,4.67 36.68,4.92 34.65,4.92 33.89,5.68 30.08,5.68 26.65,9.11 | 26.65,9.11 26.52,9.24 | v26.27,9.24 26.52,9.24 | 26.52,9.24 26.65,9.11
PIO3_3  (via drill 0.38)
  Top 0.254: U1.48 30.32,9.24 v30.84,9.24
  Bottom 0.254: v30.84,9.24 31.6,10 31.6,10.76 38.21,17.37 39.86,17.37 P3.17
PIO3_4  (via drill 0.38)
  Top 0.254: v24.49,34.41 U2.36
  Bottom 0.254: P4.14 32.24,32.63 27.79,32.63 27.29,33.14 26.78,33.14 25.76,33.14 v24.49,34.41
PIO3_5  (via drill 0.38)
  Top 0.254: U2.37 25.25,35.86 v25.25,36.19
  Bottom 0.254: P4.15 35.29,32.38 33.38,32.38 32.62,33.14 28.05,33.14 25.25,35.94 v25.25,36.19
PIO3_6  (via drill 0.38)
  Top 0.254: U2.43 26.27,39.08 v26.27,39.24
  Bottom 0.254: P4.20 47.48,32.63 46.08,32.63 45.83,32.89 43.8,32.89 43.03,33.65 41.51,33.65 41.26,33.9 39.22,33.9 38.46,34.67 36.94,34.67 36.68,34.92 34.65,34.92 33.89,35.68 30.08,35.68 26.65,39.11 | 26.65,39.11 26.52,39.24 | v26.27,39.24 26.52,39.24 | 26.52,39.24 26.65,39.11
PIO3_7  (via drill 0.38)
  Top 0.254: U2.48 30.32,39.24 v30.84,39.24
  Bottom 0.254: v30.84,39.24 31.6,40 31.6,40.76 38.21,47.37 39.86,47.37 P5.17
RESET  (via drill 0.38)
  Top 0.254: U1.3 28.56,11.08 v28.56,10.51 | v35.41,17.62 35.67,17.37 39.22,17.37 40.07,16.52 R1.1 41.76,16.35 42.53,15.59 42.62,15.68 42.62,15.75 42.53,15.84 S1.1 42.78,15.68 P1.10 41.76,12.54 41.51,12.29 41.51,11.52 40.75,10.76 40.48,10.49 D1.1
  Bottom 0.254: v35.41,17.62 35.41,16.86 31.6,13.05 30.59,13.05 28.56,11.02 v28.56,10.51
RESET1  (via drill 0.38)
  Top 0.254: U2.3 28.56,41.08 v28.56,40.51 | v35.41,47.62 35.67,47.37 39.22,47.37 40.07,46.52 R24.1 41.76,46.35 42.53,45.59 42.62,45.68 42.62,45.75 42.53,45.84 S4.1 42.78,45.68 P6.10 41.76,42.54 41.51,42.29 41.51,41.52 40.75,40.76 40.48,40.49 D10.1
  Bottom 0.254: v35.41,47.62 35.41,46.86 31.6,43.05 30.59,43.05 28.56,41.02 v28.56,40.51
USB_CONNECT
  Top 0.254: U1.22 19.99,12.54 19.67,12.54 18.14,11.02 15.6,8.48 15.6,7.21 14.33,5.94 14.33,5.76 Q1.1
USB_CONNECT1
  Top 0.254: U2.22 19.99,42.54 19.67,42.54 18.14,41.02 15.6,38.48 15.6,37.21 14.33,35.94 14.33,35.76 Q2.1
USB_DM
  Top 0.254: R10.1 10.98,11.4 D5.3 10.89,11.38 10.89,11.25 10.27,10.63 10.14,10.63 10.01,10.63 7.86,10.63 7.69,10.8 J1.2
USB_DM1
  Top 0.254: R18.1 10.98,41.4 D9.3 10.89,41.38 10.89,41.25 10.27,40.64 10.14,40.64 10.01,40.64 7.86,40.64 7.69,40.8 J2.2
USB_DP
  Top 0.254: R11.1 10.98,9.37 | 10.98,9.37 D5.2 10.96,9.43 10.27,10.13 7.86,10.13 7.73,10 J1.3 | 10.98,9.37 10.98,7.75 R7.1
USB_DP1
  Top 0.254: R19.1 10.98,39.37 | 10.98,39.37 D9.2 10.96,39.43 10.27,40.13 7.86,40.13 7.73,40 J2.3 | 10.98,39.37 10.98,37.75 R16.1
USB_VBUS
  Top 0.254: U1.14 22.85,15.33 21.7,15.33 R5.2 R3.1
USB_VBUS1
  Top 0.254: U2.14 22.85,45.33 21.7,45.33 R22.2 R17.1
USBD+
  Top 0.254: U1.19 20.84,13.81 19.67,13.81 19.41,13.81 17.13,11.52 17,11.4 R10.2
USBD+1
  Top 0.254: U2.19 20.84,43.81 19.67,43.81 19.41,43.81 17.13,41.52 17,41.4 R18.2
USBD-
  Top 0.254: U1.20 20.64,13.3 19.67,13.3 15.73,9.37 R11.2
USBD-1
  Top 0.254: U2.20 20.64,43.3 19.67,43.3 15.73,39.37 R19.2
VBUS
  Top 0.406: 9.25,13.05 9.38,13.05 L1.2
  Top 0.508: J1.1 8.67,11.6 9,11.27 9,11.52 | 9,11.52 9.25,11.78 9.25,13.05 | D5.4 9.06,11.46 9,11.52
VBUS1
  Top 0.406: 9.25,43.05 9.38,43.05 L2.2
  Top 0.508: J2.1 8.67,41.6 9,41.27 9,41.52 | 9,41.52 9.25,41.78 9.25,43.05 | D9.4 9.06,41.46 9,41.52
XTALIN
  Top 0.254: U1.6 28.91,13.56 31.35,13.56 35.29,9.62 Y1.1 35.29,5.64 C4.1
XTALIN1
  Top 0.254: U2.6 28.91,43.56 31.35,43.56 35.29,39.62 Y2.1 35.29,35.64 C12.1
XTALOUT
  Top 0.254: U1.7 28.71,14.06 28.81,14.06 31.6,14.06 32.67,13 Y1.2 35.29,14.45 35.92,15.08
  Top 0.406: 35.92,15.08 C5.1
XTALOUT1
  Top 0.254: U2.7 28.71,44.06 28.81,44.06 31.6,44.06 32.67,43 Y2.2 35.29,44.45 35.92,45.08
  Top 0.406: 35.92,45.08 C13.1

## Text on the board
tPlace: USBug, (c) 2012, Michel Stempin. All rights reserved. | CC-BY-SA | Revision A | D43324 | michel.stempin@wanadoo.fr | 30/01/2012
bPlace: USBug, (c) 2012, Michel Stempin. All rights reserved. | CC-BY-SA | Revision A | USBug, (c) 2012, Michel Stempin. All rights reserved. | CC-BY-SA | Revision A
bNames: +5V | GND | PIO2_9 | PIO0_7 | PIO2_5 | PIO2_4 | PIO1_9 | PIO0_5 | PIO0_4 | PIO2_1 | PIO2_8 | PIO2_7 | PIO0_2 | PIO1_8 | PIO2_0 | PIO2_6 | PIO3_3 | PIO1_7 | PIO1_6 | PIO1_5 | +3.3V | GND | PIO2_10 | PIO2_2 | PIO0_8 | PIO0_9 | PIO0_10 | PIO1_10 | PIO2_11 | PIO0_11 | PIO1_0 | PIO1_1 | PIO1_2 | PIO3_0 | PIO3_1 | PIO2_3 | PIO1_3 | PIO1_4 | PIO1_11 | PIO3_2 | +5V | GND | PIO2_9 | PIO0_7 | PIO2_5 | PIO2_4 | PIO1_9 | PIO0_5 | PIO0_4 | PIO2_1 | PIO2_8 | PIO2_7 | PIO0_2 | PIO1_8 | PIO2_0 | PIO2_6 | PIO3_3 | PIO1_7 | PIO1_6 | PIO1_5 | +3.3V | GND | PIO2_10 | PIO2_2 | PIO0_8 | PIO0_9 | PIO0_10 | PIO1_10 | PIO2_11 | PIO0_11 | PIO1_0 | PIO1_1 | PIO1_2 | PIO3_0 | PIO3_1 | PIO2_3 | PIO1_3 | PIO1_4 | PIO1_11 | PIO3_2
Black: © 2012, Michel Stempin. All rights reserved. | Licensed under a Creative Commons | Attribution-Share-Alike Unported License. | See creativecommons.org/licenses/by-sa/3.0/ | CC-BY-SA
_tNames: C3 | P3 | R6 | L1 | C2 | C7 | C5 | R1 | R5 | C6 | PWR | R3 | R4 | R2 | U1 | Y1 | RST | VR1 | R10 | C1 | D5 | R11 | D1 | D43324 | R7 | Q1 | USER | C9 | USBug | J1 | C4 | SWD | USB | R12 | Rev. A | R9 | ISP | R8 | C8 | P2 | C10 | CC-BY-SA | C3 | P3 | R6 | L1 | C2 | C7 | C5 | R1 | R5 | C6 | PWR | R3 | R4 | R2 | U1 | Y1 | RST | VR1 | R10 | C1 | D5 | R11 | D1 | D43324 | R7 | Q1 | USER | C9 | USBug | J1 | C4 | SWD | USB | R12 | Rev. A | R9 | ISP | R8 | C8 | P2 | C10 | CC-BY-SA